# Altium PCB BTT-SFS-HAT.PcbDoc
Units mm, origin at the board's own origin, x right, y up, seen from the top; angles counter-clockwise.
Board outline 65 x 56.5 mm, 2 copper layers (Top Layer, Bottom Layer), stack 0.173 mm thick; 13 components, 31 nets, 116 pads, 4 vias.
Unrouted connection lines stored in the file: 49.
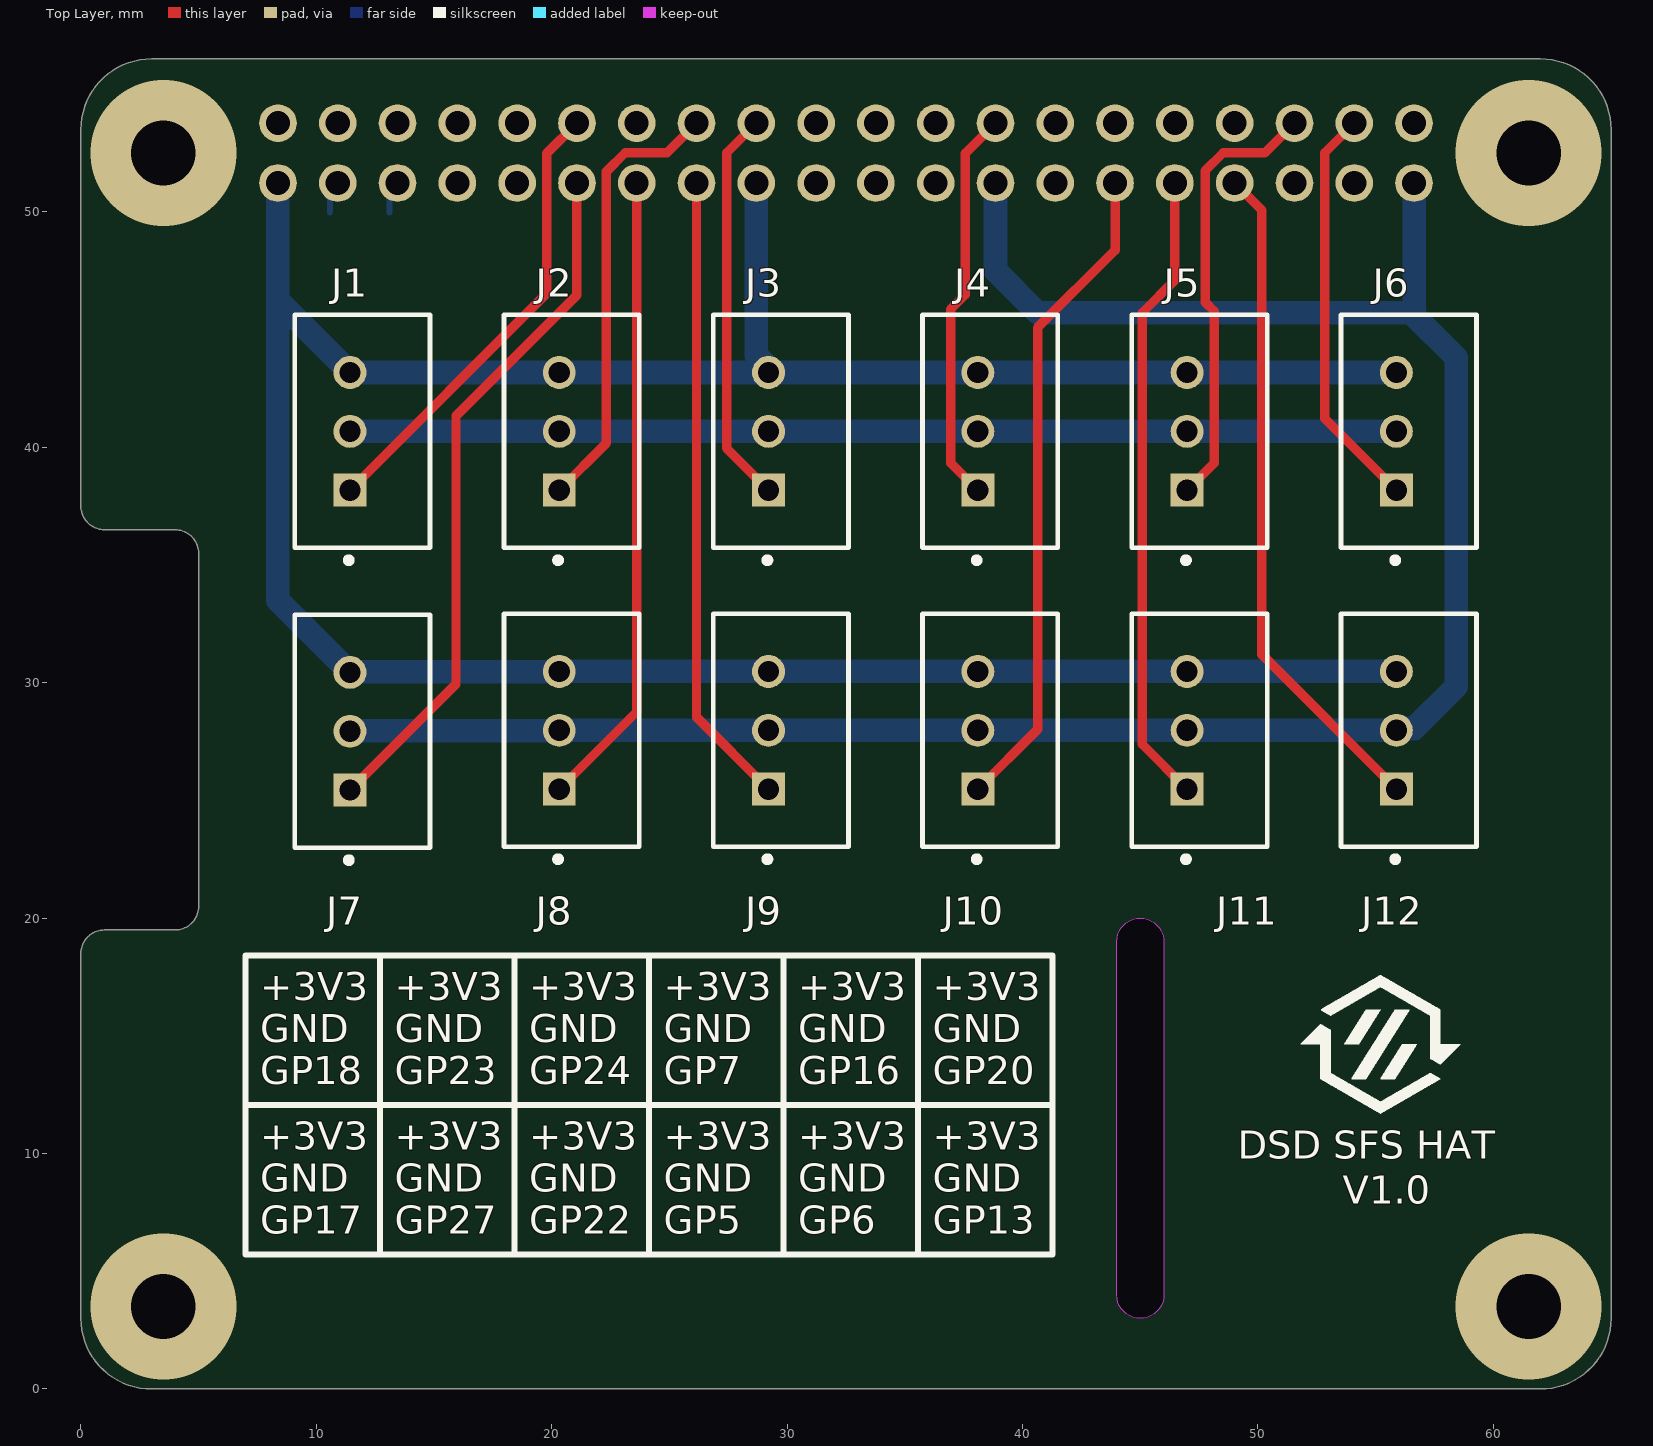
[diagram p0: Top Layer view]
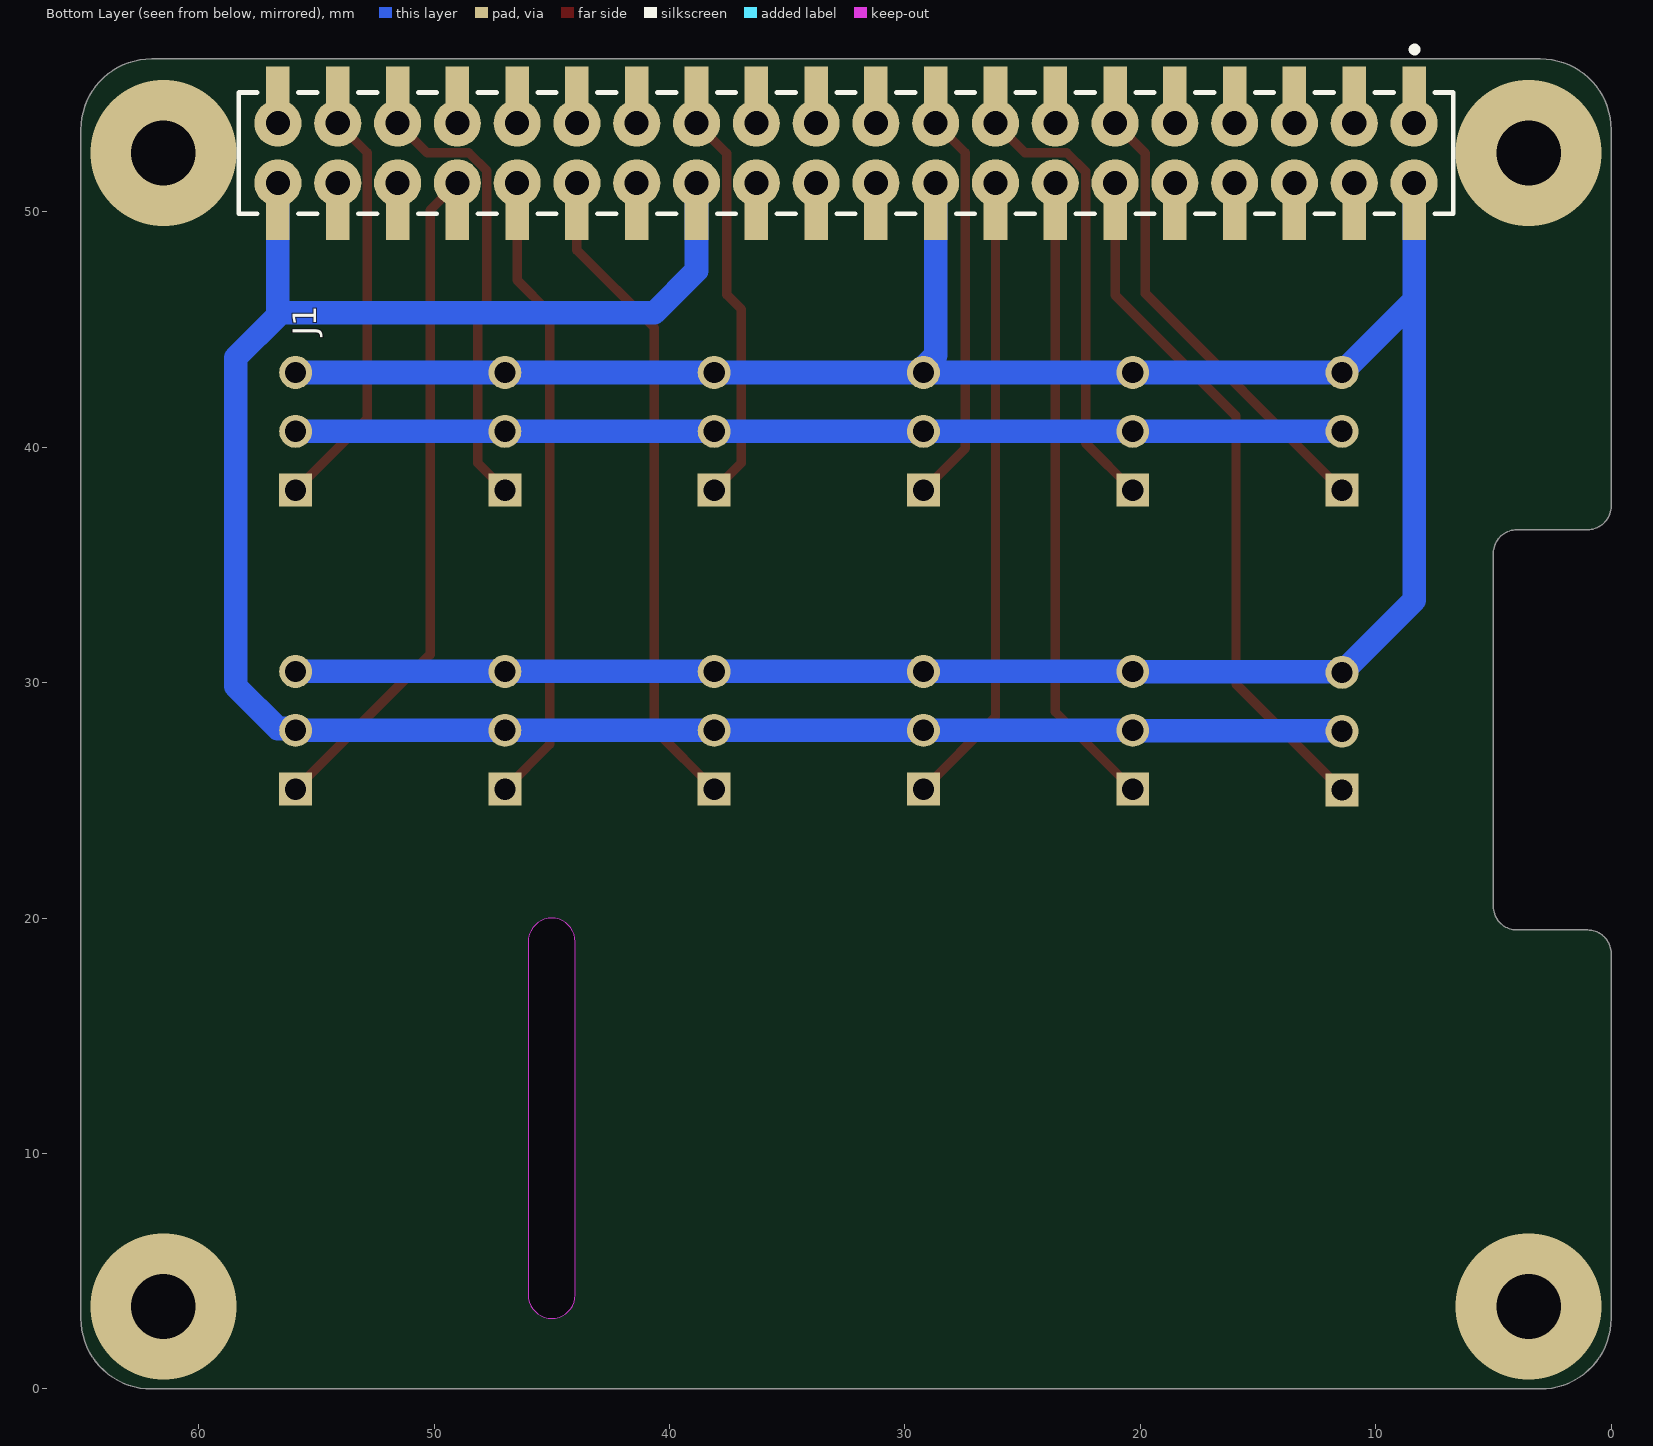
[diagram p1: Bottom Layer view, seen from below]

## Layer stack, top to bottom
Top Solder: solder mask 0.0102, Solder Resist, Dk 3.5
Top Layer: signal copper 0.0356
Dielectric 1: core 0.1016, Core-009, Dk 4.5
Bottom Layer: signal copper 0.0356
Bottom Solder: solder mask 0.0102, Solder Resist, Dk 3.5

## Board outline
0,3 0,18.5 cw(c1,18.5) 1,19.5 4,19.5 ccw(c4,20.5) 5,20.5 5,35.5 ccw(c4,35.5) 4,36.5 1,36.5 cw(c1,37.5) 0,37.5 0,53.5 cw(c3,53.5) 3,56.5 62,56.5 cw(c62,53.5) 65,53.5 65,3 cw(c62,3) 62,0 3,0 cw(c3,3)
cut-out: 44,4 44,19 cw(c45,19) 45,20 cw(c45,19) 46,19 46,4 cw(c45,4) 45,3 cw(c45,4)

## Design rules (kind name [scope] priority, off if disabled: settings)
Clearance [All] p1: gap=0.254 ignorepadtopadclearanceinfootprint=FALSE except(0.2: Arc-SMDPad Track-SMDPad SMDPad-SMDPad)
HoleSize [All] p1: absolutevalues=TRUE maxlimit=3 minlimit=0.025 maxpercent=80.000 minpercent=20.000
MinimumSolderMaskSliver [All] p1: minsoldermaskwidth=0.095
NetsToIgnore [InNet('MOUNT')] p1:
PlaneConnect [All] p1: planeconnectstyle=Direct reliefexpansion=0.508 reliefentries=4 reliefconductorwidth=0.5 reliefairgap=0.254
PolygonConnect PolygonConnect_1 [InNet('5V_OUT')] p1: connectstyle=Direct reliefconductorwidth=0.254 reliefentries=4 polygonreliefangle="90 Angle" airgapwidth=0.254
PolygonConnect [All] p2: connectstyle=Relief reliefconductorwidth=1 reliefentries=4 polygonreliefangle="90 Angle" airgapwidth=0.254
RoutingVias [All] p1: holewidth=0.711 width=1.27 viastyle="Through Hole" minholewidth=0.711 minwidth=1.27 maxholewidth=0.711 maxwidth=1.27
SilkToSilkClearance [All] p1: silktosilkclearance=0.2
SilkToSolderMaskClearance [IsPad] p1: minsilkscreentomaskgap=0.14 clearancetoexposedcopper=TRUE
SolderMaskExpansion [All] p1: expansion=0.102 istentingtop=FALSE
SupplyNets "Schematic Supply Nets_2" [InNet('+3V3')] p1: voltage=0.000
SupplyNets "Schematic Supply Nets_1" [InNet('GND')] p2: voltage=0.000
SupplyNets "Schematic Supply Nets" [InNet('+5V')] p3: voltage=0.000
UnRoutedNet UnRoutedNet_1 [All] p1:
Width [All] p1: maxlimit=2 minlimit=0.1 preferedwidth=0.254 minimp=50.000000 maximp=50.000000 favimp=50.000000
24 further rules are at their usual default settings.

## Components (designator, comment, footprint, x,y, rotation, side; value= is the part's Value field where it differs from the comment)
J1 "B3B-XH-A(LF)(SN)" FP-B3B-XH-A_LF_SN-MFG 11.955,40.68 r90 top
J1 "NPPC202KFMS-RC" FP-NPPC202KFMS-RC-MFG 32.5,52.5 r0 bottom locked
J2 "B3B-XH-A(LF)(SN)" FP-B3B-XH-A_LF_SN-MFG 20.845,40.68 r90 top
J3 "B3B-XH-A(LF)(SN)" FP-B3B-XH-A_LF_SN-MFG 29.735,40.68 r90 top
J4 "B3B-XH-A(LF)(SN)" FP-B3B-XH-A_LF_SN-MFG 38.625,40.68 r90 top
J5 "B3B-XH-A(LF)(SN)" FP-B3B-XH-A_LF_SN-MFG 47.515,40.68 r90 top
J6 "B3B-XH-A(LF)(SN)" FP-B3B-XH-A_LF_SN-MFG 56.405,40.68 r90 top
J7 "B3B-XH-A(LF)(SN)" FP-B3B-XH-A_LF_SN-MFG 11.955,27.94 r90 top
J8 "B3B-XH-A(LF)(SN)" FP-B3B-XH-A_LF_SN-MFG 20.845,27.98 r90 top
J9 "B3B-XH-A(LF)(SN)" FP-B3B-XH-A_LF_SN-MFG 29.735,27.98 r90 top
J10 "B3B-XH-A(LF)(SN)" FP-B3B-XH-A_LF_SN-MFG 38.625,27.98 r90 top
J11 "B3B-XH-A(LF)(SN)" FP-B3B-XH-A_LF_SN-MFG 47.515,27.98 r90 top
J12 "B3B-XH-A(LF)(SN)" FP-B3B-XH-A_LF_SN-MFG 56.405,27.98 r90 top

## Footprints (in the part's own frame and the unit in brackets; to place one, negate y for a bottom-side part, rotate by r counter-clockwise, add the part's x,y. Pads: shape width x height; smd on the part's side, far side on the other; paste and mask are expansions set on the pad)
FP-B3B-XH-A_LF_SN-MFG [mm]
  rect 1.4x1.4 hole 0.9 paste-2539.97 mask+0: 1(-2.5,0.525)
  round 1.4 hole 0.9 paste-2539.97 mask+0: 2(0,0.525) 3(2.5,0.525)
  silkscreen extent -5.6,-2.88 4.95,2.88, body extent -5.05,-2.98 5.05,2.98, height 0.25
FP-NPPC202KFMS-RC-MFG [mm]
  rect 1x1.56 smd paste+0 mask+0: 1(-24.13,-2.905) 2(-24.13,2.905) 3(-21.59,-2.905) 4(-21.59,2.905) 5(-19.05,-2.905) 6(-19.05,2.905) 7(-16.51,-2.905) 8(-16.51,2.905) 9(-13.97,-2.905) 10(-13.97,2.905) 11(-11.43,-2.905) 12(-11.43,2.905) 13(-8.89,-2.905) 14(-8.89,2.905) 15(-6.35,-2.905) 16(-6.35,2.905) 17(-3.81,-2.905) 18(-3.81,2.905) 19(-1.27,-2.905) 20(-1.27,2.905) 21(1.27,-2.905) 22(1.27,2.905) 23(3.81,-2.905) 24(3.81,2.905) 25(6.35,-2.905) 26(6.35,2.905) 27(8.89,-2.905) 28(8.89,2.905) 29(11.43,-2.905) 30(11.43,2.905) 31(13.97,-2.905) 32(13.97,2.905) 33(16.51,-2.905) 34(16.51,2.905) 35(19.05,-2.905) 36(19.05,2.905) 37(21.59,-2.905) 38(21.59,2.905) 39(24.13,-2.905) 40(24.13,2.905)
  round 2 / inner round 1.6 / far side round 1.6 hole 1.02 paste-2539.97 mask+0: ""(-24.13,-1.27) ""(-13.97,1.27) ""(3.81,1.27)
  round 2 / inner round 1.02 / far side round 1.6 hole 1.02 paste-2539.97 mask+0: ""(-24.13,1.27) ""(-21.59,-1.27) ""(-21.59,1.27) ""(-19.05,1.27) ""(-16.51,-1.27) ""(-16.51,1.27) ""(-13.97,-1.27) ""(-11.43,-1.27) ""(-11.43,1.27) ""(-8.89,-1.27) ""(-8.89,1.27) ""(-6.35,-1.27) ""(-6.35,1.27) ""(-3.81,-1.27) ""(-3.81,1.27) ""(-1.27,-1.27) ""(-1.27,1.27) ""(1.27,-1.27) ""(1.27,1.27) ""(3.81,-1.27) ""(6.35,-1.27) ""(6.35,1.27) ""(8.89,-1.27) ""(8.89,1.27) ""(11.43,-1.27) ""(11.43,1.27) ""(13.97,-1.27) ""(13.97,1.27) ""(16.51,-1.27) ""(16.51,1.27) ""(19.05,-1.27) ""(19.05,1.27) ""(21.59,-1.27) ""(21.59,1.27) ""(24.13,-1.27) ""(24.13,1.27)
  round 2 / inner round 1.8 / far side round 1.6 hole 1.02 paste-2539.97 mask+0: ""(-19.05,-1.27)
  silkscreen extent -25.8,-4.52 25.8,2.58, body extent -25.65,-3.42 25.65,3.42, height 7.75

## Part data
J1 J2 J3 J4 J5 J6 J7 J8 J9 J10 J11 J12: library part CMP-002-00077-1, "Connector Header, XH Series, 3 Position, 2.50mm, Through Hole, Press-Fit, Solder, Natural"
J1: library part CMP-25680-000027-1, "CONN HDR 40POS 0.1 GOLD SMD", Color=Black, Package Quantity=1000, Connector Type=Header, Contact Material=Bronze, Contact Plating=Gold, Height=7.1mm, Housing Color=Black, Housing Material=Nylon, Lead Free="Lead Free", Length=51.3mm, Mount="Surface Mount", Number of Positions=40, Number of Rows=2, Packaging=Bulk, Pitch=0.1inch, Row Spacing=0.1inch, Termination=Solder, Width=5mm

## Via types
v1: diameter 6.2, hole 2.75, Top Layer to Bottom Layer, 4 vias

## Nets (pads, with @x,y where several pads share a name; then routed paths per layer and width w, separated by ;. In a path a pad name is that pad's centre, name@x,y a point inside that pad or via, vN(x,y) a via of type N, cw(c..) or ccw(c..) an arc to the next point about the centre after c; other vN are vias at no path point)
+3V3: J1.2@8.37,49.595 J1.3@11.43,43.18 J1.18 J1.@8.37,51.23 J1.@28.69,51.23 J2.3 J3.3 J4.3 J5.3 J6.3 J7.3 J8.3 J9.3 J10.3 J11.3 J12.3 | length 123.6
  Bottom Layer w1: J1.@8.37,51.23 8.37,49.595 8.37,46.24 ; J1.@28.69,51.23 J1.18 28.69,43.916 29.21,43.396 J3.3 ; J12.3 J11.3 J10.3 J9.3 J8.3 20.3,30.46 11.45,30.46 J7.3 8.37,33.5 8.37,46.24 ; J6.3 J5.3 J4.3 J3.3 ; 8.37,46.24 11.43,43.18 J2.3 J3.3
+5V: J1.1@8.37,55.405 J1.3@10.91,55.405 J1.@8.37,53.77 J1.@10.91,53.77
CAN_INT: J1.21 J1.@33.77,53.77
GND: J1.2@11.43,40.68 J1.5 J1.10 J1.13 J1.19 J1.26 J1.29 J1.33 J1.40 J1.@13.45,53.77 J1.@18.53,51.23 J1.@23.61,53.77 J1.@31.23,53.77 J1.@38.85,51.23 J1.@43.93,53.77 J1.@49.01,53.77 J1.@56.63,51.23 J2.2 J3.2 J4.2 J5.2 J6.2 J7.2 J8.2 J9.2 J10.2 J11.2 J12.2 | length 136.6
  Bottom Layer w1: J7.2 11.45,27.96 20.3,27.96 J8.2 J9.2 J10.2 J11.2 J12.2 55.957,28.057 56.632,28.057 58.42,29.845 58.42,43.815 56.63,45.605 ; J1.2@11.43,40.68 J2.2 J3.2 J4.2 J5.2 J6.2 ; J1.@38.85,51.23 J1.26 38.85,47.51 40.64,45.72 56.515,45.72 56.63,45.605 ; J1.@56.63,51.23 J1.40 56.63,45.605
GPIO5: J1.30 J1.@43.93,51.23 J10.1 | length 28.2
  Top Layer w0.4: J10.1 40.64,28.02 40.64,45.085 43.93,48.375 J1.@43.93,51.23
GPIO6: J1.32 J1.@46.47,51.23 J11.1 | length 27.1
  Top Layer w0.4: J1.@46.47,51.23 46.47,47.105 45.085,45.72 45.085,27.385 J11.1
GPIO7: J1.25 J1.@38.85,53.77 J4.1 | length 16.9
  Top Layer w0.4: J4.1 36.946,39.334 36.946,45.872 37.564,46.49 37.564,52.484 J1.@38.85,53.77
GPIO12: J1.31 J1.@46.47,53.77
GPIO13: J1.34 J1.@49.01,51.23 J12.1 | length 28.6
  Top Layer w0.4: J1.@49.01,51.23 50.165,50.075 50.165,31.195 J12.1
GPIO16: J1.35 J1.@51.55,53.77 J5.1 | length 18.8
  Top Layer w0.4: J5.1 48.144,39.334 48.144,45.782 47.756,46.17 47.756,51.749 48.523,52.516 50.296,52.516 J1.@51.55,53.77
GPIO17: J1.12 J1.@21.07,51.23 J7.1 | length 29.8
  Top Layer w0.4: J7.1 15.934,29.944 15.934,41.334 21.07,46.47 J1.@21.07,51.23
GPIO18: J1.1@11.43,38.18 J1.11 J1.@21.07,53.77 | length 19.6
  Top Layer w0.4: J1.1@11.43,38.18 19.784,46.534 19.784,52.484 J1.@21.07,53.77
GPIO19: J1.36 J1.@51.55,51.23
GPIO20: J1.37 J1.@54.09,53.77 J6.1 | length 17.4
  Top Layer w0.4: J1.@54.09,53.77 52.836,52.516 52.836,41.224 J6.1
GPIO21: J1.39 J1.@56.63,53.77
GPIO22: J1.16 J1.@26.15,51.23 J9.1 | length 27
  Top Layer w0.4: J1.@26.15,51.23 26.15,28.54 J9.1
GPIO23: J1.15 J1.@26.15,53.77 J2.1 | length 19
  Top Layer w0.4: J2.1 22.324,40.184 22.324,51.717 23.123,52.516 24.896,52.516 J1.@26.15,53.77
GPIO24: J1.17 J1.@28.69,53.77 J3.1 | length 16.8
  Top Layer w0.4: J1.@28.69,53.77 27.436,52.516 27.436,39.954 J3.1
GPIO26: J1.38 J1.@54.09,51.23
GPIO27: J1.14 J1.@23.61,51.23 J8.1 | length 27.1
  Top Layer w0.4: J8.1 23.61,28.77 J1.@23.61,51.23
ID_SC: J1.27 J1.@41.39,53.77
ID_SD: J1.28 J1.@41.39,51.23
RGB: J1.8 J1.@15.99,51.23
SCL1_I2C: J1.6 J1.@13.45,51.23 | length 1.4
  Bottom Layer w0.254: J1.6@13.116,49.982 13.116,50.896 J1.@13.45,51.23
SDA1_I2C: J1.4 J1.@10.91,51.23 | length 1.4
  Bottom Layer w0.254: J1.4@10.576,49.982 10.576,50.896 J1.@10.91,51.23
SPI0_CE0: J1.23 J1.@36.31,53.77
SPI0_MISO: J1.22 J1.@33.77,51.23
SPI0_MOSI: J1.20 J1.@31.23,51.23
SPI0_SCLK: J1.24 J1.@36.31,51.23
UART0_RXD: J1.9 J1.@18.53,53.77
UART0_TXD: J1.7 J1.@15.99,53.77
copper on no net:
  other v1: 3.5,3.5 61.5,3.5 3.5,52.5 61.5,52.5

## Silkscreen, mask and mechanical layers (free items; w line width, h text height)
Top Overlay:
  drawing of 15 lines, arcs and shapes, not listed
  text "+3V3" at 7.62,16.51 h1.2
  text "+3V3" at 13.335,16.51 h1.2
  text "+3V3" at 19.05,16.51 h1.2
  text "+3V3" at 24.765,16.51 h1.2
  text "+3V3" at 30.48,16.51 h1.2
  text "+3V3" at 36.195,16.51 h1.2
  text "GND" at 7.62,14.732 h1.2
  text "GND" at 13.335,14.732 h1.2
  text "GND" at 19.05,14.732 h1.2
  text "GND" at 24.765,14.732 h1.2
  text "GND" at 30.48,14.732 h1.2
  text "GND" at 36.195,14.732 h1.2
  text "GP18" at 7.62,12.954 h1.2
  text "GP23" at 13.335,12.954 h1.2
  text "GP24" at 19.05,12.954 h1.2
  text "GP7" at 24.765,12.954 h1.2
  text "GP16" at 30.48,12.954 h1.2
  text "GP20" at 36.195,12.954 h1.2
  text "+3V3" at 7.62,10.16 h1.2
  text "+3V3" at 13.335,10.16 h1.2
  text "+3V3" at 19.05,10.16 h1.2
  text "+3V3" at 24.765,10.16 h1.2
  text "+3V3" at 30.48,10.16 h1.2
  text "+3V3" at 36.195,10.16 h1.2
  text "DSD SFS HAT" at 49.149,9.779 h1.2
  text "GND" at 7.62,8.382 h1.2
  text "GND" at 13.335,8.382 h1.2
  text "GND" at 19.05,8.382 h1.2
  text "GND" at 24.765,8.382 h1.2
  text "GND" at 30.48,8.382 h1.2
  text "GND" at 36.195,8.382 h1.2
  text "V1.0" at 53.594,7.874 h1.2
  text "GP17" at 7.62,6.604 h1.2
  text "GP27" at 13.335,6.604 h1.2
  text "GP22" at 19.05,6.604 h1.2
  text "GP5" at 24.765,6.604 h1.2
  text "GP6" at 30.48,6.604 h1.2
  text "GP13" at 36.195,6.604 h1.2
Mechanical 1:
  pour cut-out: 44,4 44,19 cw(c45,19) 45,20 cw(c45,19) 46,19 46,4 cw(c45,4) 45,3 cw(c45,4)
  lines w0.254: 0,3 ccw(c3,3) 3,0 62,0 ccw(c62,3) 65,3 65,53.5 ccw(c62,53.5) 62,56.5 3,56.5 ccw(c3,53.5) 0,53.5 0,37.5 ccw(c1,37.5) 1,36.5 4,36.5 cw(c4,35.5) 5,35.5 5,20.5 cw(c4,20.5) 4,19.5 1,19.5 ccw(c1,18.5) 0,18.5 0,3 ; 44,4 ccw(c45,4) 45,3 ccw(c45,4) 46,4 46,19 ccw(c45,19) 45,20 ccw(c45,19) 44,19 44,4